# Altium PCB PCB_MPPT.PcbDoc
Units mil, origin at the board's own origin, x right, y up, seen from the top; angles counter-clockwise.
Board outline 5822.84 x 4988.19 mil, 2 copper layers (Top Layer, Bottom Layer); 115 components, 51 nets, 314 pads, 100 vias.
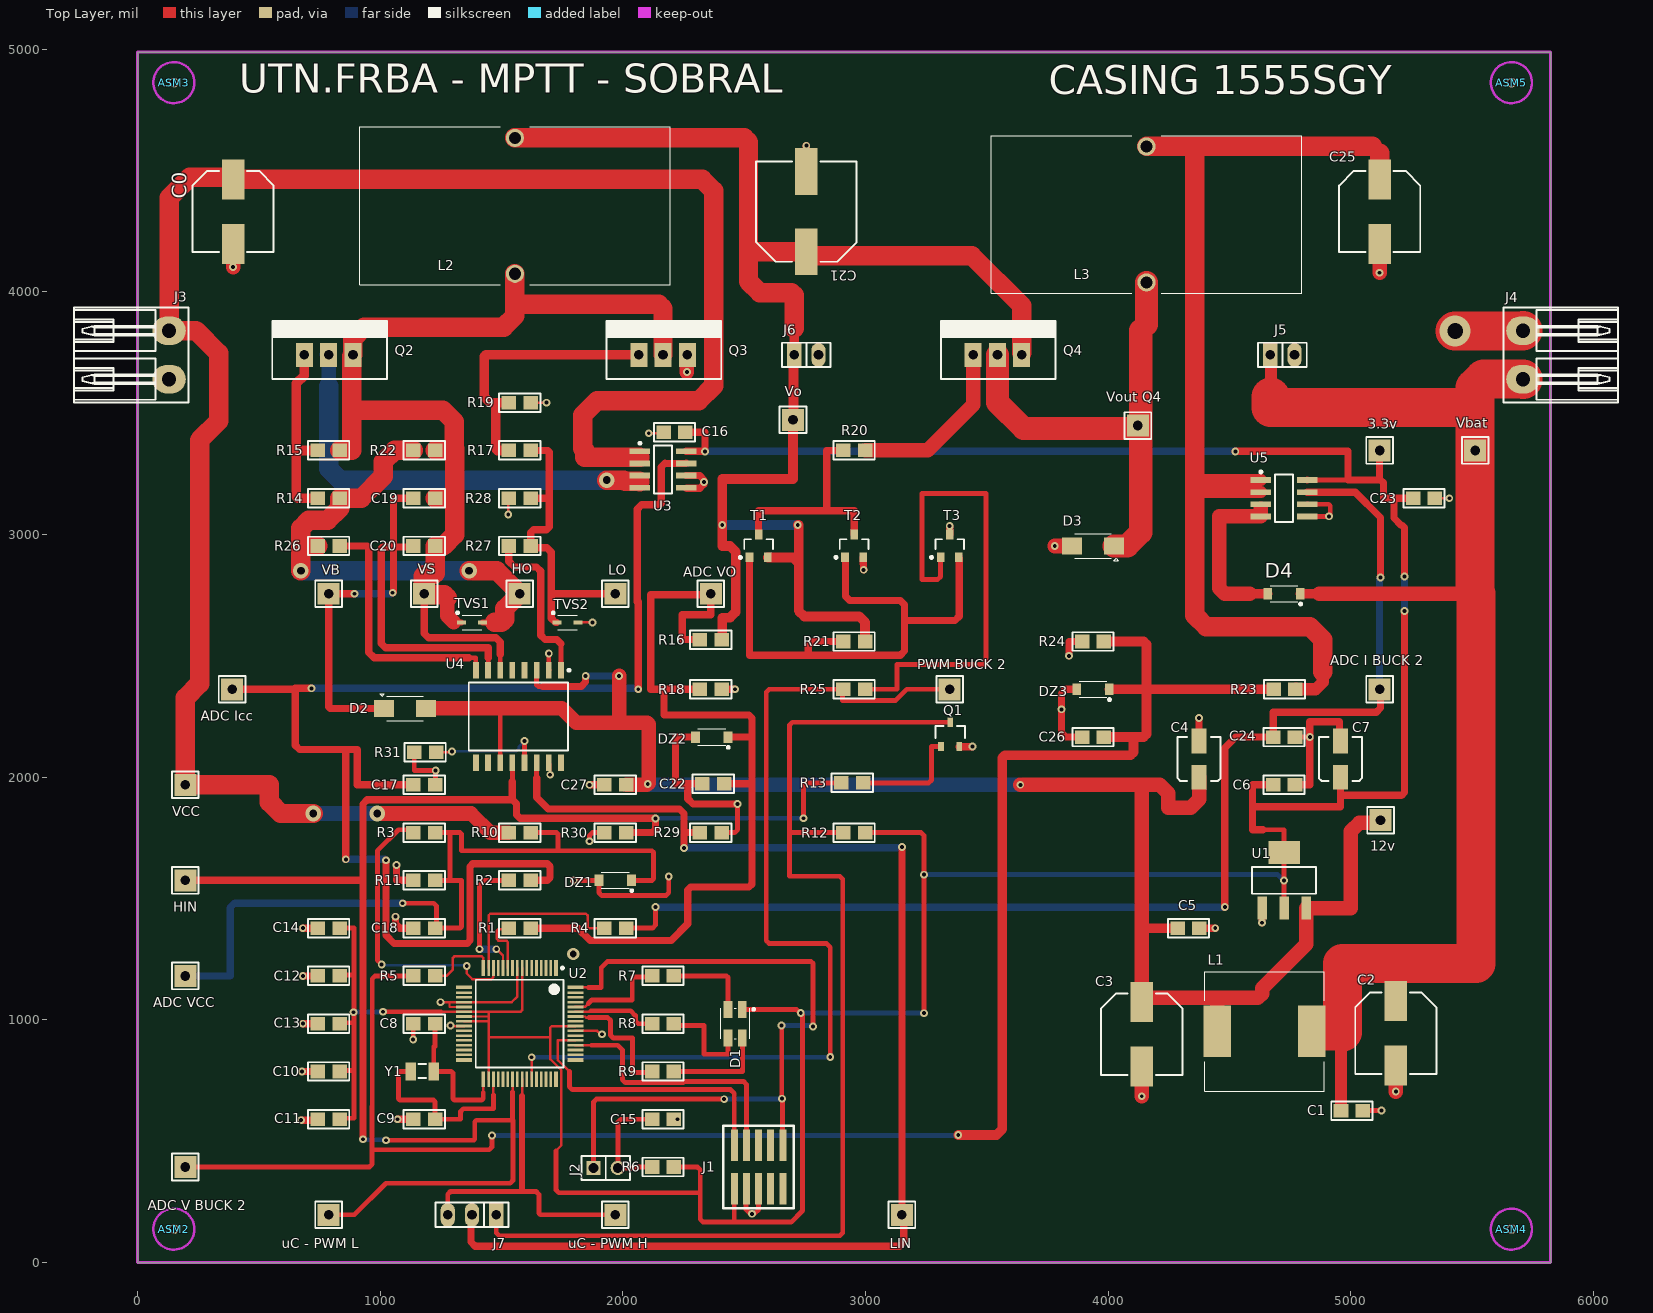
[diagram p0: Top Layer view]
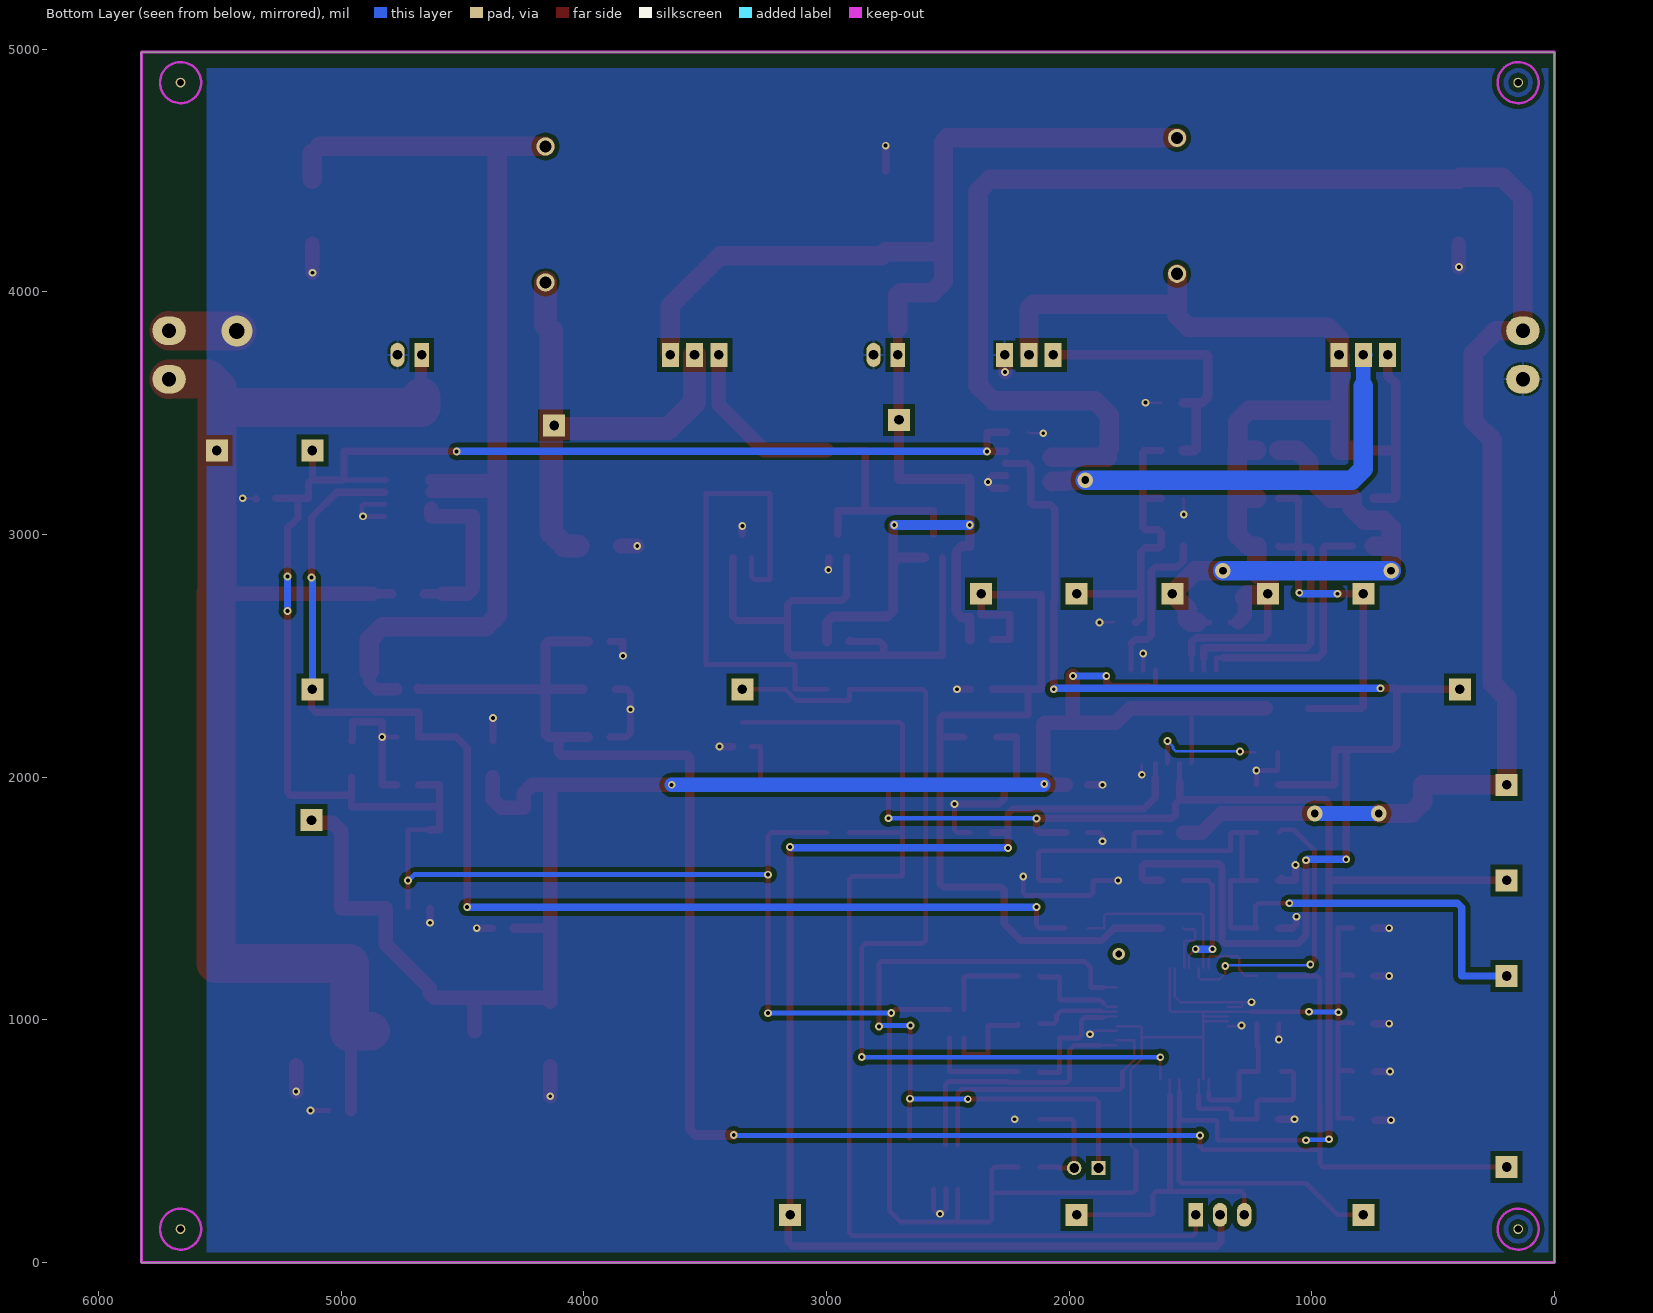
[diagram p1: Bottom Layer view, seen from below]
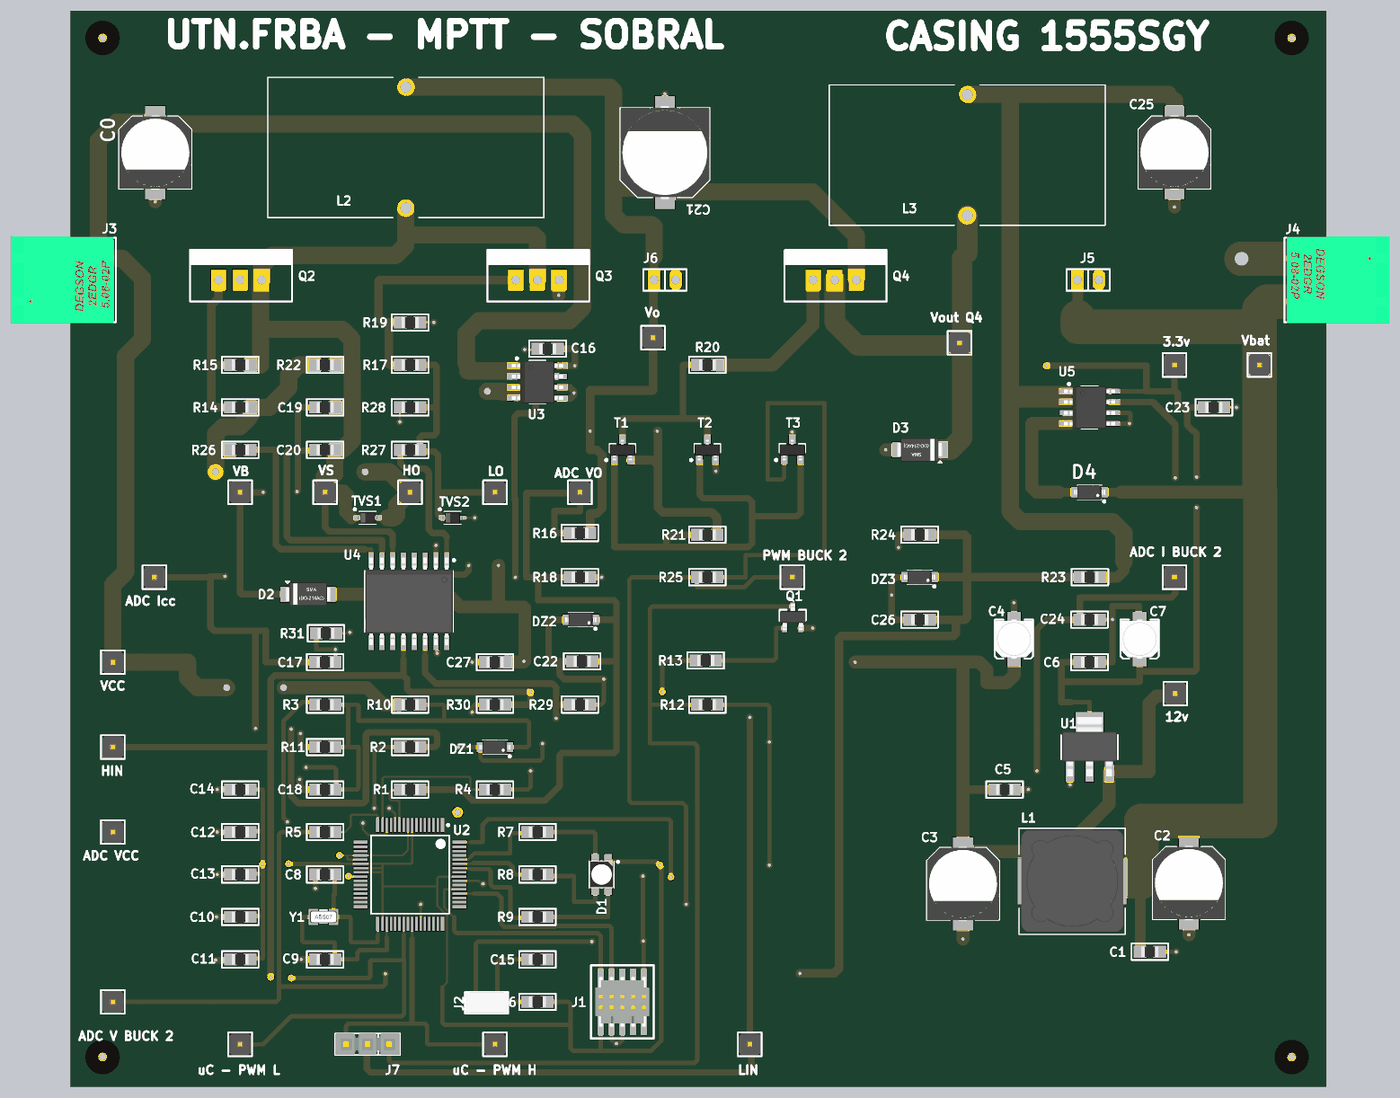
[diagram p2: 3D render of the assembled board from above, using the file's embedded part models]

## Layer stack, top to bottom
Top Solder: solder mask 0.4, Solder Resist, Dk 3.5
Top Layer: signal copper 1.4
Dielectric 1: dielectric 12.6, FR-4, Dk 4.8
Bottom Layer: signal copper 1.4
Bottom Solder: solder mask 0.4, Solder Resist, Dk 3.5

## Board outline
0,0 0,4988.19 5822.83,4988.19 5822.83,0

## Design rules (kind name [scope] priority, off if disabled: settings)
Clearance [All] p1: gap=8 ignorepadtopadclearanceinfootprint=FALSE except(19.68: Arc-Poly Track-Poly THPad-Poly Via-Poly Fill-Poly Poly-Poly)
MinimumSolderMaskSliver [All] p1 off: minsoldermaskwidth=10
PolygonConnect [All] p1: thpad.connectstyle=Relief thpad.reliefconductorwidth=10 thpad.reliefentries=4 thpad.polygonreliefangle="90 Angle" thpad.airgapwidth=10 smdpad.connectstyle=Relief smdpad.reliefconductorwidth=10 smdpad.reliefentries=4 smdpad.polygonreliefangle="45 Angle" smdpad.airgapwidth=10 via.connectstyle=Direct via.reliefconductorwidth=10 via.reliefentries=4 via.polygonreliefangle="90 Angle" via.airgapwidth=10
RoutingVias [All] p1: holewidth=16 width=32 viastyle="Through Hole" minholewidth=16 minwidth=32 maxholewidth=32 maxwidth=64
SilkToSilkClearance [All] p1 off: silktosilkclearance=10
SilkToSolderMaskClearance [IsPad] p1 off: minsilkscreentomaskgap=10 clearancetoexposedcopper=TRUE
SolderMaskExpansion [All] p1: expansion=4 istentingtop=FALSE
Width [All] p1: maxlimit=300 minlimit=10 preferedwidth=30 bottomlayer_minwidth=11 minimp=50.000000 maximp=50.000000 favimp=50.000000
27 further rules are at their usual default settings.

## Classes and differential pairs
component class Buck2: "ADC I BUCK 2" "ADC V BUCK 2" C23 C24 C25 C26 D3 D4 DZ3 L3 "PWM BUCK 2" Q4 R20 R21 R23 R24 R25 T1 T2 T3 U5 "Vout Q4"
component class Microcontrolador: ASM2 ASM3 ASM4 C8 C9 C10 C11 C12 C13 C14 C15 D1 J1 J2 R1 R2 R3 R4 R5 R6 R7 R8 R9 U2 Y1
component class Fuente: 3.3v 12v C1 C2 C3 C4 C5 C6 C7 L1 q U1 Vbat
component class Control: "ADC Icc" "ADC VCC" C0 C16 C17 C18 C19 C20 C27 D2 DZ1 HIN HO J3 J4 J5 J6 J7 LIN LO Q1 R10 R11 R12 R13 R22 R26 R27 R28 R29 R30 R31 TVS1 TVS2 U3 U4 "uC - PWM H" "uC - PWM L" VB VCC
component class Buck: "ADC VO" C21 C22 DZ2 L2 Q2 Q3 R14 R15 R16 R17 R18 R19 Vo VS

## Components (designator, comment, footprint, x,y, rotation, side; value= is the part's Value field where it differs from the comment)
3.3v "3.3v" TPTH 5118.11,3346.46 r0 top
12v "12v" TPTH 5122.05,1822.83 r0 top
"ADC I BUCK 2" "" TPTH 5118.11,2362.2 r90 top
"ADC Icc" "ADC Icc" TPTH 389.76,2362.2 r0 top
"ADC V BUCK 2" "" TPTH 196.85,393.7 r90 top
"ADC VCC" "ADC VCC" TPTH 196.85,1181.1 r0 top
"ADC VO" "ADC Vo" TPTH 2362.2,2755.91 r90 top
ASM2 "Fiducial" Fiducial 149.61,137.8 r90 top
ASM3 "Fiducial" Fiducial 149.61,4862.2 r90 top
ASM4 "Fiducial" Fiducial 5661.42,137.8 r90 top
ASM5 "Fiducial" Fiducial 5661.42,4862.2 r90 top (schematic designator ASM4)
C0 "1mF" CAPSMD8x8.3 393.7,4330.71 r270 top
C1 "0.1uF 25V 0805" 0805 5003.94,625.98 r0 top
C2 "100UF 35V" CAPSMD8x8.3 5185.04,944.88 r270 top
C3 "100UF 35V" CAPSMD8x8.3 4137.8,940.94 r270 top
C4 "10UF 20% 35V" CAPSMD4.3x4.3 4374.02,2074.8 r90 top
C5 "0.1uF 25V 0805" 0805 4330.71,1377.95 r0 top
C6 "0.1uF 25V 0805" 0805 4724.41,1968.5 r0 top
C7 "10UF 20% 35V" CAPSMD4.3x4.3 4956.69,2074.8 r90 top
C8 "18pF" 0805 1181.1,984.25 r180 top
C9 "18pF" 0805 1181.1,590.55 r180 top
C10 "0.1uF" 0805 787.4,787.4 r0 top
C11 "0.1uF" 0805 787.4,590.55 r0 top
C12 "0.1uF" 0805 787.4,1181.1 r180 top
C13 "0.1uF" 0805 787.4,984.25 r180 top
C14 "0.1uF" 0805 787.4,1377.95 r180 top
C15 "0.1uF" 0805 2165.35,590.55 r0 top
C16 "47nF" 0805 2212.6,3421.26 r180 top
C17 "4.7nF" 0805 1181.1,1968.5 r0 top
C18 "6.8pF" 0805 1181.1,1377.95 r180 top
C19 "0.1uF" 0805 1181.1,3149.61 r180 top
C20 "0.1uF" 0805 1181.1,2952.76 r180 top
C21 "7.5uF" CAPSMD10x10.3 2755.91,4330.71 r90 top
C22 "6.8pF" 0805 2372.32,1972.44 r180 top
C23 "47nF" 0805 5300.91,3149.61 r0 top
C24 "4.7nF" 0805 4724.41,2165.35 r0 top
C25 "4.7µF 35 V" CAPSMD8x8.3 5118.11,4330.71 r270 top
C26 "6.8pF" 0805 3937.01,2165.35 r180 top
C27 "0.1uF" 0805 1968.5,1968.5 r180 top
D1 "Led RGB" 4-plcc 2462.6,984.25 r0 top
D2 "M7" DO-214AC 1102.36,2283.46 r0 top
D3 "M7" DO-214AC 3937.01,2952.76 r180 top
D4 "DIODO" SOD123 4724.41,2755.91 r180 top
DZ1 "TVS 3.3V" sod123 1968.5,1574.8 r180 top
DZ2 "TVS 3.3V" sod123 2366.14,2165.35 r180 top
DZ3 "TVS 3.3V" sod123 3937.01,2362.2 r180 top
HIN "HIN" TPTH 196.85,1574.8 r90 top
HO "HO" TPTH 1574.8,2755.91 r0 top
J1 "JTAG/SWD Programmer" FTSH-105-01-XXX-DV-K 2559.06,393.7 r0 top
J2 "JUMPER" JUMPER2 1929.13,389.76 r0 top
J3 "BORNERA 2" Bornera2_DegsonH 129.92,3740.16 r270 top
J4 "BORNERA 2" Bornera2_DegsonH 5708.66,3740.16 r90 top
J5 "CON2" SIP2 4717.72,3740.16 r0 top
J6 "CON2" SIP2 2755.91,3740.16 r0 top
J7 "CON3" SIP3 1377.95,196.85 r180 top
L1 "100uHy" SRR1210 4643.7,952.76 r180 top
L2 "INDUCTOR" IND_HCTI-220-5.8 1555.12,4354.33 r90 top
L3 "INDUCTOR" IND_HCTI-220-5.8 4157.48,4318.9 r90 top
LIN "LIN" TPTH 3149.61,196.85 r0 top
LO "LO" TPTH 1968.5,2755.91 r90 top
"PWM BUCK 2" "" TPTH 3346.46,2362.2 r90 top
Q1 "2N7002-7-F" SOT23 3311.02,2125.98 r0 top
Q2 "IRF530" "TO-220 V" 787.4,3740.16 r0 top
Q3 "IRF530" "TO-220 V" 2165.35,3740.16 r0 top
Q4 "MOSFET P" "TO-220 V" 3543.31,3740.16 r0 top
R1 "10K 5% 0805" 0805 1574.8,1377.95 r0 top
R2 "10K 5% 0805" 0805 1574.8,1574.8 r0 top
R3 "10K 5% 0805" 0805 1181.1,1771.65 r0 top
R4 "10K 5% 0805" 0805 1968.5,1377.95 r0 top
R5 "10K 5% 0805" 0805 1181.1,1181.1 r180 top
R6 "10K 5% 0805" 0805 2165.35,393.7 r0 top
R7 "1K 5% 0805" 0805 2165.35,1181.1 r0 top
R8 "1K 5% 0805" 0805 2165.35,984.25 r0 top
R9 "1K 5% 0805" 0805 2165.35,787.4 r0 top
R10 "68k 5% 0805" 0805 1574.8,1771.65 r180 top
R11 "10k 5% 0805" 0805 1181.1,1574.8 r0 top
R12 "1k 5% 0805" 0805 2952.76,1771.65 r0 top
R13 "10 5% 0805" 0805 2944.88,1976.38 r180 top
R14 "10 5% 0805" 0805 787.4,3149.61 r0 top
R15 "1k 5% 0805" 0805 787.4,3346.46 r180 top
R16 "47k 5% 0805" 0805 2362.2,2566.93 r0 top
R17 "10 5% 0805" 0805 1574.8,3346.46 r0 top
R18 "10k 5% 0805" 0805 2362.2,2362.2 r180 top
R19 "1k 5% 0805" 0805 1574.8,3543.31 r180 top
R20 "10 5% 0805" 0805 2952.76,3346.46 r180 top
R21 "4.7k 5% 0805" 0805 2952.76,2559.06 r180 top
R22 "1k 5% 0805" 0805 1181.1,3346.46 r0 top
R23 "39k 5% 0805" 0805 4726.1,2362.2 r0 top
R24 "10k 5% 0805" 0805 3937.01,2559.06 r0 top
R25 "1K 5% 0805" 0805 2952.76,2362.2 r0 top
R26 "10 5% 0805" 0805 787.4,2952.76 r180 top
R27 "10 5% 0805" 0805 1574.8,2952.76 r0 top
R28 "1k 5% 0805" 0805 1574.8,3149.61 r0 top
R29 "1k 5% 0805" 0805 2362.2,1771.65 r180 top
R30 "1k 5% 0805" 0805 1968.5,1771.65 r0 top
R31 "1k 5% 0805" 0805 1185.04,2102.36 r0 top
T1 "BC547" SOT23-3 2559.06,2952.76 r90 top
T2 "BC557" SOT23-3 2952.76,2952.76 r90 top
T3 "BC547" SOT23-3 3346.46,2952.76 r90 top
TVS1 "Transient Voltage Supressor" SOD323 1377.95,2637.8 r0 top
TVS2 "Transient Voltage Supressor" SOD323 1771.65,2637.8 r0 top
U1 "1117-3.3V" SOT223 4724.41,1574.8 r0 top
U2 "LPC5441" LQFP64 1574.8,984.25 r270 top
U3 "TMCS1108A4BQDR" SOIC8 2165.35,3267.72 r0 top
U4 "IR2110 16" SOIC16W 1569.49,2250 r270 top
U5 "TMCS1108A4BQDR" SOIC8 4724.41,3149.61 r0 top
"uC - PWM H" "PWM L" TPTH 1968.5,196.85 r0 top
"uC - PWM L" "PWM H" TPTH 787.4,196.85 r90 top
VB "VB" TPTH 787.4,2755.91 r0 top
Vbat "Vbat" TPTH 5511.81,3346.46 r0 top
VCC "VCC" TPTH 196.85,1968.5 r0 top
Vo "Vo" TPTH 2700.79,3472.44 r90 top
"Vout Q4" "Vout Q4" TPTH 4122.05,3448.82 r90 top
VS "VS" TPTH 1181.1,2755.91 r90 top
Y1 "32.768 kHz" ABS07_Xtal 1125.98,787.4 r0 top

## Footprints (in the part's own frame and the unit in brackets; to place one, negate y for a bottom-side part, rotate by r counter-clockwise, add the part's x,y. Pads: shape width x height; smd on the part's side, far side on the other; paste and mask are expansions set on the pad)
4-plcc [mm]
  rect 0.9x1.8 smd: A(0.75,1.5) B(0.75,-1.5) G(-0.75,-1.5) R(-0.75,1.5)
  silkscreen extent -1.5,-1.6 2.04,1.61, body extent -1.4,-1.75 1.4,1.75, height 1.9
0805 [mil] "Pasivo 0805"
  rect 60x56 smd: 1(-45,0) 2(45,0)
  silkscreen extent -85,-38 85,38, body extent -39,-24 39,25, height 15
ABS07_Xtal [mm]
  rect 1.1x1.9 smd: 1(0,0) 2(2.4,0)
  silkscreen extent 0.8,-0.7 1.6,0.8, body extent -0.41,-0.76 2.81,0.76, height 0.91
Bornera2_DegsonH [mm]
  oval 3x3.5 hole 1.5: 1(-2.54,0) 2(2.54,0)
  silkscreen extent -4.98,-9.95 4.98,2.05, body extent -5.08,-10.3 5.08,1.8, height 8.2
CAPSMD4.3x4.3 [mm] "Aluminum Electrolytic Capacitor, Body 8,30x8,30x10,00mm, IPC Low Density"
  rect 2.6x1.6 smd: 1(-1.9,0) 2(1.9,0)
  silkscreen extent -2.3,-2.25 2.3,2.25, body extent -2.28,-2.15 2.32,2.15, height 5.6
CAPSMD8x8.3 [mm] "Aluminum Electrolytic Capacitor, Body 8,30x8,30x10,00mm, IPC Low Density"
  rect 4.2x2.35 smd: 1(-3.375,0) 2(3.375,0)
  silkscreen extent -4.25,-4.25 4.25,4.25, body extent -4.35,-4.25 4.35,4.25, height 10
CAPSMD10x10.3 [mm] "Aluminum Electrolytic Capacitor, Body 10,30x10,30x10,00mm, IPC Low Density"
  rect 4.9x2.35 smd: 1(-4.2,0) 2(4.2,0)
  silkscreen extent -5.25,-5.25 5.25,5.25, body extent -5.45,-5.25 5.45,5.25, height 10
DO-214AC [mm]
  rect 2.1x1.8 smd: 1(2.2,0) 2(-2.2,0)
  silkscreen extent -2.67,-1.27 1.91,1.52, body extent -2.75,-1.4 2.75,1.4, height 2.6
Fiducial [mil] "Fiducial Mark for PickN'Place"
  round 40 hole 30 mask+60: 0(0,0)
FTSH-105-01-XXX-DV-K [mil]
  rect 29x130 smd mask+2: 1(-100,-90) 2(-100,90) 3(-50,-90) 4(-50,90) 5(0,-90) 6(0,90) 7(50,-90) 8(50,90) 9(100,-90) 10(100,90)
  silkscreen extent -145,-170 145,170, body extent -125,-115 125,115, height 237
IND_HCTI-220-5.8 [mil]
  round 75 hole 50: 1(-280,0) 2(280,0)
  silkscreen extent -325,-640 325,640
JUMPER2 [mm]
  rect 1.5x1.5 hole 1.016: 1(-1.27,0)
  round 1.5 hole 1.016: 2(1.27,0)
  silkscreen extent -2.54,-1.27 2.54,1.27, body extent -2.46,-1.27 2.54,1.27, height 9.5
LQFP64 [mm]
  rect 1.65x0.4 smd: 1(-5.825,3.81) 16(-5.825,-3.81) 33(5.825,-3.81) 48(5.825,3.81)
  rect 1.65x0.28 smd: 2(-5.825,3.25) 3(-5.825,2.75) 4(-5.825,2.25) 5(-5.825,1.75) 6(-5.825,1.25) 7(-5.825,0.75) 8(-5.825,0.25) 9(-5.825,-0.25) 10(-5.825,-0.75) 11(-5.825,-1.25) 12(-5.825,-1.75) 13(-5.825,-2.25) 14(-5.825,-2.75) 15(-5.825,-3.25) 34(5.825,-3.25) 35(5.825,-2.75) 36(5.825,-2.25) 37(5.825,-1.75) 38(5.825,-1.25) 39(5.825,-0.75) 40(5.825,-0.25) 41(5.825,0.25) 42(5.825,0.75) 43(5.825,1.25) 44(5.825,1.75) 45(5.825,2.25) 46(5.825,2.75) 47(5.825,3.25)
  rect 0.4x1.65 smd: 17(-3.81,-5.825) 32(3.81,-5.825) 49(3.81,5.825) 64(-3.81,5.825)
  rect 0.28x1.65 smd: 18(-3.25,-5.825) 19(-2.75,-5.825) 20(-2.25,-5.825) 21(-1.75,-5.825) 22(-1.25,-5.825) 23(-0.75,-5.825) 24(-0.25,-5.825) 25(0.25,-5.825) 26(0.75,-5.825) 27(1.25,-5.825) 28(1.75,-5.825) 29(2.25,-5.825) 30(2.75,-5.825) 31(3.25,-5.825) 50(3.25,5.825) 51(2.75,5.825) 52(2.25,5.825) 53(1.75,5.825) 54(1.25,5.825) 55(0.75,5.825) 56(0.25,5.825) 57(-0.25,5.825) 58(-0.75,5.825) 59(-1.25,5.825) 60(-1.75,5.825) 61(-2.25,5.825) 62(-2.75,5.825) 63(-3.25,5.825)
  silkscreen extent -5.95,-4.6 4.6,4.6, body extent -5,-5 5,5, height 1.6
SIP2 [mm]
  rect 1.5x2.5 hole 1.016: 1(-1.27,0)
  oval 1.5x2.5 hole 1.016: 2(1.27,0)
  silkscreen extent -2.54,-1.27 2.54,1.27
SIP3 [mm]
  rect 1.5x2.5 hole 1.016: 1(-2.54,0)
  oval 1.5x2.5 hole 1.016: 2(0,0) 3(2.54,0)
  silkscreen extent -3.81,-1.27 3.81,1.27, body extent -3.81,-1.3 3.81,1.24, height 8.38
SOD123 [mm]
  rect 0.9x1.2 smd: 1(1.7,0) 2(-1.7,0)
  silkscreen extent -1.85,-0.85 1.45,1.2, body extent -1.85,-0.85 1.85,0.85, height 1.35
sod123 [mm]
  rect 0.9x1.2 smd: 1(1.7,0) 2(-1.7,0)
  silkscreen extent -1.85,-0.85 1.45,1.2, body extent -1.85,-0.85 1.85,0.85, height 1.35
SOD323 [mm]
  rect 0.95x0.45 smd: 1(-1.1,0) 2(1.1,0)
  silkscreen extent -1.62,-0.75 1,1.12, body extent -1.3,-0.67 1.3,0.68, height 1.1
SOIC8 [mm]
  rect 2.15x0.6 smd: 1(-2.425,1.905) 2(-2.425,0.635) 3(-2.425,-0.635) 4(-2.425,-1.905) 5(2.425,-1.905) 6(2.425,-0.635) 7(2.425,0.635) 8(2.425,1.905)
  silkscreen extent -2.55,-2.5 0.95,2.88, body extent -3.01,-2.51 3.01,2.49, height 1.75
SOIC16W [mm] "SOIC 16 WIDE"
  rect 1.75x0.6 smd: 1(-4.85,4.445) 2(-4.85,3.175) 3(-4.85,1.905) 4(-4.85,0.635) 5(-4.85,-0.635) 6(-4.85,-1.905) 7(-4.85,-3.175) 8(-4.85,-4.445) 9(4.85,-4.445) 10(4.85,-3.175) 11(4.85,-1.905) 12(4.85,-0.635) 13(4.85,0.635) 14(4.85,1.905) 15(4.85,3.175) 16(4.85,4.445)
  silkscreen extent -4.97,-5.2 3.57,5.42, body extent -5.15,-5.15 5.15,5.15, height 2.65
SOT23 [mm]
  rect 0.6x0.95 smd: 1(0,0) 2(0.95,2.55) 3(1.9,0)
  silkscreen extent -0.6,0.87 2.5,2.17, body extent -0.53,-0.25 2.47,2.88, height 1
SOT23-3 [mm] "SOT23, 3-Leads, Body 2,90x2,45mm, Pitch 0,95mm, IPC Medium Density"
  rect 1x0.8 smd: 1(-1.2,0.95) 2(-1.2,-0.95) 3(1.2,0)
  silkscreen extent -1.32,-1.5 0.7,2.02, body extent -1.25,-1.5 1.2,1.5, height 1
SOT223 [mm] "SOT223"
  rect 1x2.4 smd: 1(-2.3,-2.9) 2(0,-2.9) 3(2.3,-2.9)
  rect 3.3x2.4 smd: 4(0,2.9)
  silkscreen extent -3.35,-1.4 3.35,1.4, body extent -3.25,-3.45 3.25,3.55, height 1.62
SRR1210 [mm]
  rect 2.9x5.4 smd: 1(-4.95,0) 2(4.95,0)
  silkscreen extent -6.25,-6.25 6.25,6.25, body extent -6.03,-6.03 5.97,5.97, height 8.05
"TO-220 V" [mil]
  rect 70x98.43 hole 40: 1(-100,0) 2(0,0) 3(100,0)
  silkscreen extent -232,-100 240,139, body extent -197,-79 197,118, height 709
TPTH [mm]
  rect 2.3x2.3 hole 1.016: 1(0,0)
  silkscreen extent -1.4,-1.4 1.4,1.4, body extent -1.27,-1.27 1.27,1.27, height 6.04

## Part data
3.3v 12v "ADC I BUCK 2" "ADC Icc" "ADC V BUCK 2" "ADC VCC" "ADC VO" HIN HO LIN LO "PWM BUCK 2" "uC - PWM H" "uC - PWM L" VB Vbat VCC Vo "Vout Q4" VS: library part TP
ASM2 ASM3 ASM4 ASM5: "Fiducial Mark for PCB Asembly on Pick N' Place"
C0 C2 C3: library part CAPPOL, "Capacitores electrolíticos de aluminio 100 µF 35 V Radial, encapsulado - terminales SMD 1000 h a 105°C"
C1 C5 C6 C16 C17 C18 C22 C23 C24 C26: library part CAP
C4 C7: library part CAPPOL, "Capacitores electrolíticos de aluminio 10 µF 35 V Radial, encapsulado - terminales SMD 2000 h a 105°C"
C8 C9: library part "CAPACITOR NON-POL", "CAP CER 0.1UF X7R 0805"
C10 C11 C12 C13 C14: library part "CAP NP", "CAP CER 0.1UF X7R 0805"
C15 C19 C20 C27: library part CAP, "CAP CER 0.1UF X7R 0805"
C21: library part CAPPOL, "CAP ALUM 7.5UF 20% 450V SMD"
C25: library part CAPPOL
D1: library part LED_RGB, "CREE LED P/N: CLV1L-FKB-CHMMQEHBB7673673CT-ND / CREE LED P/N: CLMVC-FKA-CL1D1L71BB7C3C3CT-ND"
D2 D3: library part DIODO, "Diodos Estándar 1000 V 1A Montaje en superficie SMA"
DZ1 DZ2 DZ3: library part "DIODO ZENER"
J1: library part JTAG, "CONN HEADER 10POS DUAL .05\" SMD -> FTSH-105-01-F-DV-K"
L1: library part INDUCTOR, "SRR1210-101M - 100 µH Blindado Drum Core, Wirewound Inductivo 2.5 A 135mOhm máx. No estándar"
L3: "https://www.delevan.com/-/media/Project/Altramotion/shared/files/Literature/brand/Delevan/pdf/powerinductor/radialleaded/powertoroids/page103_106_ptseries.pdf"
Q1: library part "MOSFET N", "Canal N Montaje en superficie 60 V 115mA (Ta) 370mW (Ta) SOT-23-3"
Q2 Q3: library part "MOSFET N"
R1 R2 R3 R4 R5 R7 R8 R9 R10 R11 R12 R13 R14 R15 R16 R17 R18 R19 R20 R21 R22 R23 R24 R25 R26 R27 R28 R29 R30 R31: library part RES
R6: library part RES, "RES SMD 10K OHM 5% 1/8W 0805"
T1 T3: library part "TRANSISTOR NPN", "Transistores - Bipolar (BJT) - Simple NPN 45 V 100 mA 300MHz 500 mW Orificio pasante TO-92-3"
T2: library part "TRANSISTOR PNP", "Transistores - Bipolar (BJT) - Simple PNP 45 V 100 mA 150MHz 500 mW Orificio pasante TO-92-3"
TVS1 TVS2: library part TVS
U1: library part LT1117CST-3.3, "IC REG LINEAR 3.3V 800MA SOT223", Dropout Voltage(V)=1.1, Manufacturer="Linear Technology", Output Voltage="3.3 V", Supplier Part Number 1=LT1117CST-3.3-ND, ComponentLink1Description="Manufacturer URL", ComponentLink1URL=http://www.linear.com/, ComponentLink2Description=Datasheet, ComponentLink2URL=http://cds.linear.com/docs/en/datasheet/1117fd.pdf, ComponentLink3Description="Package Specification", ComponentLink3URL=http://cds.linear.com/docs/en/packaging/SOT_3_05-08-1630.pdf, DatasheetVersion="Rev. D", Discrete Pass Element=no, Iout(mA)=800, Isupply(mA)=5, Mounting Technology="Surface Mount", Number of Outputs=1, PackageDescription="3-Pin Plastic SOT-223, 3.505 x 6.505 mm Body, Pitch 2.3 mm", PackageReference=ST-3, PackageVersion=Jun-10, PartNumber=LT1117CST-3.3, PSRR(dB)=75, RoHS=FALSE, Supplier 1=Digi-Key, Supplier 2=Newark, Supplier Part Number 2=57M1797, Vin Max(V)=15, Vin Min(V)=2.45
U3 U5: library part MLX91221KDC, "Sensores de corriente 1 canal Efecto Hall Bidireccional 8-SOIC (ancho 0.154\", 3.90mm)"
U4: "Medio puente controladores de compuerta IC No inversor 14-DIP"
Y1: library part "XTAL ABS07", "XTAL ABS07 by ABRACON LLC"

## Via types
v1: diameter 32, hole 16, Top Layer to Bottom Layer, tented both sides, 82 vias
v2: diameter 32, hole 16, Top Layer to Bottom Layer, 11 vias
v3: diameter 64, hole 32, Top Layer to Bottom Layer, tented both sides, 4 vias
v4: diameter 50, hole 28, Top Layer to Bottom Layer, 1 vias
v5: diameter 128, hole 64, Top Layer to Bottom Layer, tented both sides, 1 vias
v6: diameter 64, hole 32, Top Layer to Bottom Layer, 1 vias

## Nets (pads, with @x,y where several pads share a name; then routed paths per layer and width w, separated by ;. In a path a pad name is that pad's centre, name@x,y a point inside that pad or via, vN(x,y) a via of type N, cw(c..) or ccw(c..) an arc to the next point about the centre after c; other vN are vias at no path point)
+3.3V: 3.3v.1 C6.1 C7.1 C10.2 C11.2 C12.1 C13.1 C14.1 C16.1 C23.1 D1.A J1.1 R6.2 R12.2 U1.2 U1.4 U2.8 U2.22 U2.23 U2.24 U2.34 U2.56 U3.8 U5.8 | length 15373.3
  Top Layer w10: 1250,1033.46 U2.22 1446.85,1033.46 ; U2.24 1442.38,994.09 ; U2.23 1446.85,1013.78 ; U2.34 1446.85,929.13 ; U2.8 1584.65,1039.91 1578.2,1033.46 1446.85,1033.46 ; 1724.41,460.63 1746.18,482.4 1746.18,792.99 1700.69,838.48 1700.69,929.13 ; U2.56 1707.13,974.41 1700.69,967.97 1700.69,929.13 ; 1446.85,929.13 1446.85,1013.78 ; 1446.85,929.13 1700.69,929.13 ; 1446.85,1013.78 1446.85,1033.46
  Top Layer w20: C11.2 836.38,594.53 891.74,594.53 891.74,791.38 ; C10.2 836.38,791.38 891.74,791.38 ; C13.1 836.38,988.23 891.74,988.23 ; C12.1 836.38,1185.08 891.74,1185.08 ; C14.1 891.74,1377.95 891.74,1185.08 ; v2@891.74,1029.89 891.74,988.23 ; v2@891.74,1033.46 891.74,1185.08 ; v2(1011.81,1033.46) 1250,1033.46 ; 1724.41,460.63 1724.41,299.12 1736.13,287.4 2318.9,287.4 ; R6.2 2307.18,393.7 2318.9,381.98 2318.9,287.4 ; 2459.06,175.73 J1.1 ; D1.A 2714.91,1043.31 2730.32,1027.9 v2(2732.63,1027.9) 2740.16,1020.37 2740.16,213.94 2693.01,166.79 2455.12,166.79 2330.61,166.79 2318.9,178.5 2318.9,287.4 ; R12.2 3228.44,1771.65 3240.16,1759.94 v1(3240.16,1598.43) v1(3240.16,1027.56) ; 4637.8,1783.46 4724.41,1783.46 U1.4 v1(4724.41,1574.8) U1.2 ; U5.8@4819.88,3224.41 4988.19,3224.41 ; 891.74,791.38 891.74,988.23
  Top Layer w30: C16.1 2338.58,3421.26 v1@2338.58,3342.72 ; U3.8 v1@2338.58,3342.72 ; v1(2338.58,3342.52) v1@2338.58,3342.72 ; v2(4523.62,3342.52) 4988.19,3342.52 4988.19,3224.41 5118.11,3224.41 ; 4637.8,1783.46 4594.49,1783.46 4594.49,1877.95 ; C6.1 4594.49,1968.5 4594.49,1877.95 ; U5.8@4819.88,3224.41 U5.8 ; C7.1 4956.69,1925.2 ; 3.3v.1 5118.11,3224.41 ; v1(5220.47,2685.04) 5220.47,1936.91 5208.76,1925.2 4956.69,1925.2 ; v1(5220.47,2826.77) 5220.47,3027.65 5208.76,3039.37 5205.43,3039.37 5177.17,3067.63 5177.17,3149.61 ; C23.1@5269.96,3149.61 5177.17,3149.61 ; 4594.49,1877.95 4956.69,1877.95 4956.69,1925.2 ; 5118.11,3224.41 5122.14,3224.41 5133.86,3212.69 5133.86,3149.61 5177.17,3149.61
  Bottom Layer w11: v2(890.13,1031.5) v2@891.12,1032.48 ; v2@1010.83,1032.48 v2(1011.81,1033.46)
  Bottom Layer w20: v2@891.12,1032.48 v2@1010.83,1032.48 ; v2@2736.22,1027.56 v1(3240.16,1027.56) ; v1(3240.16,1598.43) 4697.54,1598.43 4721.16,1574.8 v1(4724.41,1574.8)
  Bottom Layer w30: v1(2338.58,3342.52) v2(4523.62,3342.52) ; v1(5220.47,2685.04) v1(5220.47,2826.77)
+12V: 12v.1 C3.1 C4.1 C5.1 C27.1 D2.1 L1.2 U1.3 U4.3 U4.11 | length 7334.1
  Top Layer w20: 1484.25,2283.46 1494.49,2283.46 ; U4.11 1494.49,2283.46 ; 1499.8,2283.46 1494.49,2283.46 ; U4.3 1644.49,2380.46 1650.93,2374.02 1669.29,2374.02
  Top Layer w30: 1669.29,2374.02 1827.98,2374.02 1846.07,2392.11 1846.07,2416.57 v1(1846.46,2416.95)
  Top Layer w40: 4137.8,1377.95 C5.1
  Top Layer w60: D2.1 1484.25,2283.46 ; 1499.8,2283.46 1748.03,2283.46 1807.09,2224.41 1984.25,2224.41 ; v1(1984.25,2416.95) 1984.25,2224.41 ; C27.1 v1@2098.43,1968.5 ; v1@2106.3,1974.95 2106.3,2217.97 2099.86,2224.41 1984.25,2224.41 ; v1(3637.8,1968.5) 4137.8,1968.5 ; C4.1 4375.18,1998.83 4375.18,1908.88 4340.03,1873.73 4248.03,1873.73 4248.03,1933.36 4212.88,1968.5 4137.8,1968.5 ; L1.2 4448.82,1090.55 ; 12v.1 5111.12,1811.9 5035.15,1811.9 5000,1776.76 5000,1460.63 U1.3 4814.96,1311.02 4633.86,1129.92 4633.86,1108.12 4616.28,1090.55 4448.82,1090.55 ; 4137.8,1968.5 4137.8,1377.95 C3.1 4154.53,1090.55 4448.82,1090.55
  Bottom Layer w30: v1(1846.46,2416.95) v1(1984.25,2416.95)
  Bottom Layer w60: v1@2106.3,1968.5 v1(3637.8,1968.5)
  other v1: 2102.36,1972.44
ADC_I_Buck2: "ADC I BUCK 2.1" C24.1 R4.2 U5.7 | length 5106
  Top Layer w20: R4.2 2122.14,1377.95 2133.86,1389.67 v1(2133.86,1464.57)
  Top Layer w30: v1(4480.31,1464.57) 4480.31,2120.22 4525.45,2165.35 C24.1 4679.41,2267.72 5104.47,2267.72 5122.05,2285.29 5122.05,2358.27 5118.11,2362.2 ; U5.7 5017.86,3174.61 5122.05,3070.42 v1(5122.05,2822.83)
  Bottom Layer w30: v1(2133.86,1464.57) v1(4480.31,1464.57) ; 5118.11,2362.2 5118.11,2818.36 5122.05,2822.29 v1(5122.05,2822.83)
ADC_Icc: "ADC Icc.1" C17.1 R2.2 U3.7 | length 5734.2
  Top Layer w30: 389.76,2362.2 649.61,2362.2 ; v1@715.99,2366.14 649.61,2366.14 649.61,2131.75 667.18,2114.17 858.27,2114.17 ; v1(858.27,1661.42) 858.27,2114.17 ; v1(1023.62,1657.48) 1023.62,1348.28 1056.94,1314.96 1358.36,1314.96 1370.08,1326.68 1370.08,1631.45 1381.79,1643.16 1688.3,1643.16 1700.02,1631.45 1700.02,1586.52 1688.3,1574.8 R2.2 ; C17.1 940.94,1968.5 905.51,1968.5 905.51,2114.17 858.27,2114.17 ; v1(2062.99,2362.2) 2062.99,2723.38 2059.06,2723.38 2059.06,3104.47 2076.63,3122.05 2151.04,3122.05 2157.48,3128.49 2157.48,3278.29 2173.85,3294.66 2175.79,3292.72 2259.25,3292.72 2260.83,3294.29 U3.7
  Bottom Layer w30: v1(716.54,2366.14) 2058.51,2366.14 2062.45,2362.2 v1(2062.99,2362.2) ; v1(858.27,1661.42) 1019.14,1661.42 1023.08,1657.48 v1(1023.62,1657.48)
ADC_V_Buck2: "ADC V BUCK 2.1" C26.1 DZ3.2 R5.2 R23.1 R24.2 | length 7903.9
  Top Layer w20: 220.47,393.7 955.1,393.7 966.82,405.42 966.82,464.57 ; R5.2 978.83,1181.1 967.11,1169.39 967.11,643.4 966.82,643.1 966.82,464.57 ; v1(1460.63,523.62) 1460.63,476.28 1448.91,464.57 966.82,464.57
  Top Layer w40: v1(3381.89,525.59) 3539.56,525.59 3562.99,549.02 3562.99,2078.84 3574.71,2090.55 4092.54,2090.55 4104.25,2102.27 4104.25,2165.35 ; C26.1 4104.25,2165.35 ; R24.2 4145.76,2559.06 4157.48,2547.34 4157.48,2362.2 ; DZ3.2 4157.48,2362.2 ; R23.1@4681.1,2366.14 R23.1 4157.48,2362.2 ; 4104.25,2165.35 4145.76,2165.35 4157.48,2177.07 4157.48,2362.2
  Bottom Layer w20: v1(1460.63,523.62) 3379.92,523.62 v1(3381.89,525.59)
ADC_Vcc: "ADC VCC.1" C18.1 DZ1.2 R3.2 R10.1 R11.2 | length 3390.3
  Top Layer w20: v1(1092.52,1480.31) 1220.57,1480.31 1232.28,1468.6 1232.28,1382.44 C18.1@1227.8,1377.95 ; C18.1 1226.1,1376.26 C18.1@1227.8,1377.95 ; R11.2 1287.4,1574.8 ; R3.2 1287.4,1771.65 ; 1335.36,1696.99 1335.36,1765.21 1328.92,1771.65 1287.4,1771.65 ; 1338.58,1696.99 1728.35,1696.99 ; R10.1 1725.84,1771.65 1732.28,1765.21 1732.28,1700.93 1728.35,1696.99 ; DZ1.2 2119.54,1574.8 2125.98,1581.25 2125.98,1690.55 2119.54,1696.99 1728.35,1696.99 ; C18.1@1227.8,1377.95 1328.92,1377.95 1335.36,1384.4 1335.36,1574.8 1287.4,1574.8 ; 1287.4,1574.8 1287.4,1771.65
  Bottom Layer w30: 196.85,1181.1 381.89,1181.1 381.89,1462.74 399.46,1480.31 v1(1092.52,1480.31)
ADC_Vo: "ADC VO.1" C22.1 DZ2.2 R1.2 R16.1 R18.2 | length 3697.4
  Top Layer w30: R1.2 1814.03,1377.95 1865.03,1326.95 2199.14,1326.95 2267.72,1395.53 2267.72,1535.53 2279.43,1547.24 2519.78,1547.24 2531.5,1558.96 2531.5,1976.38 ; R18.2 2175.73,2362.2 ; R16.1 2244.09,2566.93 2244.09,2669.29 2362.2,2669.29 2362.2,2755.91 2358.27,2751.97 2114.17,2751.97 2114.17,2362.2 2175.73,2362.2 ; C22.1 2527.56,1972.44 2531.5,1976.38 ; DZ2.2 2519.78,2165.35 ; 2175.73,2362.2 2169.29,2355.76 2169.29,2255.91 2519.78,2255.91 2531.5,2244.19 2531.5,1976.38
GND: C0.2 C1.2 C2.2 C3.2 C4.2 C5.2 C6.2 C7.2 C8.2 C9.2 C10.1 C11.1 C12.2 C13.2 C14.2 C15.2 C16.2 C17.2 C18.2 C21.2 C22.2 C23.2 C24.2 C25.2 C26.2 C27.2 D3.1 DZ1.1 DZ2.1 DZ3.1 J1.3 J1.5 J3.2 J4.2 J5.2 J6.2 Q1.3 Q3.3 R11.1 R18.1 R19.1 R24.1 R28.1 R29.1 R30.1 R31.1 T2.2 T3.3 TVS2.2 U1.1 U2.9 U2.20 U2.21 U2.25 U2.55 U3.5 U3.6 U4.2 U4.15 U5.5 U5.6 | length 6708.8
  Top Layer w10: C11.1@738.46,586.61 C11.1 ; C10.1@740.16,785.16 C10.1 ; v2(1248.03,1072.83) 1281.78,1072.83 ; v2(1289.37,976.38) 1291.33,974.42 U2.25@1345.46,974.42 ; U2.21 1285.43,1053.15 1285.43,1069.18 1281.78,1072.83 ; v1(1527.56,3082.68) 1527.56,3147.36 R28.1 ; U2.9 1564.96,1096.46 1541.34,1072.83 U2.20 1281.78,1072.83 ; R19.1 v1(1685.04,3543.31) ; U4.15@1699.8,2053.15 1700.05,2052.9 1700.05,2010.29 v1(1700.3,2010.04) ; U2.55 1893.92,954.72 1907.7,940.94 v1(1913.39,940.94) ; TVS2.2 v1(1874.39,2637.8) ; v1(2106.3,3417.32) 2163.66,3417.32 C16.2 ; C15.2 v1(2224.35,590.55) ; C23.2@5349.84,3145.67 C23.2 v1(5405.51,3149.61)
  Top Layer w20: v1(1135.83,919.29) 1135.83,983.98 C8.2 ; R31.1 1140.04,2027.56 v1(1228.35,2027.56) 1228.35,1970.75 C17.2 ; U4.2@1694.88,2440.94 1694.69,2441.14 1694.69,2509.65 v1(1694.88,2509.84) ; v1(1797.78,1574.8) DZ1.1 1901.57,1523.53 1913.29,1511.81 2177.26,1511.81 2188.98,1523.53 v1(2188.98,1590.55) ; v1(1862.2,1736.22) 1862.9,1736.91 1862.9,1759.94 1874.61,1771.65 R30.1 ; R29.1 2460.73,1771.65 2472.44,1783.37 v1(2472.44,1889.76) ; J1.3 2507.87,302.52 2507.87,218.5 2523.29,203.08 2529.2,203.08 v1(2531.5,200.79) 2533.79,203.08 2544.09,203.08 2559.06,218.05 J1.5 ; C24.2 v1(4830.71,2165.35) ; U5.5 v1@4909.25,3074.61 ; U5.6 4821.26,3125.98 4822.64,3124.61 4908.07,3124.61 4914.51,3118.16 v1@4914.51,3077.31 ; C1.2 v1(5125.98,625.98)
  Top Layer w30: v1(673.23,586.61) C11.1@738.46,586.61 ; v1(677.17,787.4) 737.91,787.4 C10.1@740.16,785.16 ; v1(681.1,984.25) C13.2 ; v1(681.1,1181.1) C12.2 ; v1(681.1,1377.95) C14.2 ; v1(1062.99,1425.2) 1063.37,1424.81 1063.37,1395.14 1080.57,1377.95 C18.2 ; v1(1066.93,1637.8) 1066.93,1574.8 R11.1 R11.1@1126.06,1584.84 ; v1(1070.87,590.55) C9.2 ; v1(1862.2,1968.5) C27.2 ; U3.6 2316.07,3242.72 2334.26,3224.53 2334.26,3216.92 v1(2334.65,3216.54) v1@2333.98,3207.31 ; U3.5@2262.85,3190.7 2317.36,3190.69 2326.15,3199.48 ; DZ2.1 2216.54,2165.35 2216.54,1972.44 2267.72,1972.44 ; C22.2@2327.26,1972.38 C22.2 2267.72,1972.44 ; R18.1 v1(2462.28,2362.2) ; v1(2472.44,1889.76) 2289.23,1889.76 2267.72,1911.27 2267.72,1972.44 ; C21.2 v1(2755.91,4602.36) ; T2.2 2990.91,2904.76 2990.91,2879.17 2991.74,2878.34 2991.74,2854.71 v1(2992.13,2854.33) ; T3.3 v1(3346.46,3035.43) ; Q1.3 v1(3440.94,2125.98) ; v1(3838.58,2500) 3838.58,2559.06 R24.1 ; DZ3.1 3824.66,2362.2 3807.09,2344.63 3807.09,2182.93 3824.66,2165.35 C26.2 ; C4.2 v1(4374.02,2244.09) ; C5.2 v1(4440.94,1377.95) ; v1(4633.86,1400.14) U1.1 ; C6.2 4830.71,1968.5 v1(4830.71,2165.35) 4830.71,2228.35 4952.76,2228.35 4952.76,2149.61 C7.2 ; C23.2@5349.84,3145.67 C23.2@5351.23,3147.05
  Top Layer w60: v1(393.7,4102.36) C0.2 ; v1(2263.78,3669.18) 2263.78,3738.58 Q3.3 ; v1(3779.53,2952.76) D3.1 ; v1(4137.8,685.04) C3.2 ; v1(5118.11,4078.74) C25.2 ; v1(5185.04,704.72) C2.2
  Top Layer w160: v5(5429.13,3838.58) 5707.09,3838.58 J4.2
  other v1: 3807.09,2279.53 4909.45,3074.8
NetC8_1: C8.1 U2.33 Y1.2 | length 599.2
  Top Layer w10: 1424.8,701.18 U2.33
  Top Layer w20: C8.1 1226.1,889.76 1220.47,889.76 Y1.2 1292.77,787.4 1299.21,780.96 1299.21,675.73 1305.66,669.29 1418.36,669.29 1424.8,675.73 1424.8,701.18
NetC9_1: C9.1 U2.35 Y1.1 | length 785.9
  Top Layer w10: 1466.54,690.94 U2.35
  Top Layer w20: Y1.1 1081.25,787.4 1074.8,780.96 1074.8,675.73 1081.25,669.29 1219.66,669.29 1226.1,662.85 C9.1 1330.71,590.55 1330.71,622.05 1342.52,633.86 1466.54,633.86 1466.54,690.94
NetC15_1: C15.1 J2.2 R6.1 | length 479.8
  Top Layer w20: R6.1 2043.31,393.7 2043.31,389.76 J2.2 1979.92,390.55 1979.92,578.84 1991.63,590.55 C15.1
NetC19_1: C19.1 C20.1 L2.1 Q2.3 Q3.2 R15.1 R22.2 TVS1.1 U4.6 VS.1 | length 4434.1
  Top Layer w20: U4.6 1494.49,2506.3
  Top Layer w25: TVS1.1@1330.71,2637.8 TVS1.1
  Top Layer w30: VS.1@1181.1,2751.97 1181.1,2592.38 1198.68,2574.8 1476.91,2574.8 1494.49,2557.23 1494.49,2506.3
  Top Layer w60: 1275.59,2740.16 1275.59,2665.35 1303.15,2637.8
  Top Layer w80: R15.1 881.89,3346.46 881.89,3515.75 ; C19.1 1307.09,3149.61 ; R22.2 1291.34,3346.46 1305.12,3360.24 1305.12,3464.95 1258.26,3511.81 885.83,3511.81 881.89,3515.75 ; 1275.59,2740.16 1263.78,2751.97 1181.1,2751.97 VS.1 1177.17,2759.84 1177.17,2828.2 1183.61,2834.65 1219.66,2834.65 1226.1,2841.09 C20.1 1260.22,2952.76 1307.09,2999.62 1307.09,3149.61 ; 1307.09,3352.9 1307.09,3149.61 ; L2.1 1555.12,3948.82 ; Q3.2 2165.35,3931.25 2147.78,3948.82 1555.12,3948.82 ; 881.89,3515.75 881.89,3734.65 Q2.3 887.4,3807.47 934.26,3854.33 1508.26,3854.33 1555.12,3901.19 1555.12,3948.82
NetC19_2: C19.2 C20.2 D2.2 U4.7 VB.1 | length 2492.4
  Top Layer w20: U4.7 1444.88,2441.34 1444.88,2492.13
  Top Layer w25: 1444.49,2534.06 1444.88,2533.67
  Top Layer w30: v1(893.7,2755.91) VB.1 787.4,2289.91 793.85,2283.46 D2.2 ; v1(1051.18,2759.84) 1055.12,2763.78 1055.12,2948.82 ; 1051.18,2948.82 1010.38,2948.82 1003.94,2942.38 1003.94,2551.24 1021.51,2533.67 1444.88,2533.67 1444.88,2492.13 ; 1055.12,2952.76 1055.12,2948.82 ; 1055.12,2956.69 1055.12,3143.16 1061.56,3149.61 C19.2 ; C20.2 1132.17,2948.82 1055.12,2948.82
  Bottom Layer w30: v1(893.7,2755.91) 1046.7,2755.91 1050.64,2759.84 v1(1051.18,2759.84)
NetC25_1: C25.1 L3.2 R23.2 U5.1 U5.2 | length 4443.6
  Top Layer w50: L3.2 L3.2@4159.14,4600.56 ; 4350.39,4600.56 4356.84,4594.11 ; 4356.84,3174.61 U5.2 ; 4356.84,3224.61 U5.1 ; R23.2@4774.1,2365.2 R23.2 4854.57,2362.2 4883.86,2391.49 4883.86,2435.04 ; 5088.82,4600.56 5118.11,4571.27 ; C25.1@5111.85,4469.84 C25.1
  Top Layer w80: L3.2@4159.14,4600.56 4350.39,4600.56 5088.82,4600.56 ; 4356.84,4594.11 4356.84,3224.61 4356.84,3174.61 4356.84,2666.7 4403.7,2619.84 4830.95,2619.84 4883.86,2566.93 4883.86,2435.04 ; C25.1 5118.11,4571.27
NetD1_B: D1.B R9.2 | length 419.6
  Top Layer w20: R9.2 2492.13,787.4 D1.B
NetD1_G: D1.G R8.2 | length 415.6
  Top Layer w20: R8.2 2210.35,976.38 2334.65,976.38 2334.65,858.27 2433.07,858.27 D1.G
NetD1_R: D1.R R7.2 | length 356.7
  Top Layer w20: R7.2 2426.63,1181.1 2433.07,1174.66 D1.R
NetD3_2: "Vout Q4.1" D3.2 L3.1 Q4.2 | length 1970.9
  Top Layer w95: Q4.2 3543.31,3544.45 3650.77,3436.99 4122.05,3436.99 ; D3.2 4078.21,2952.76 4133.86,3008.41 4133.86,3448.82 ; 4122.05,3448.82 4133.86,3448.82 ; 4133.86,3841.38 4133.86,3448.82 ; 4157.48,3865 L3.1
NetD4_1: D4.1 U5.3 U5.4 | length 708.8
  Top Layer w40: 4582.68,2755.91 D4.1
  Top Layer w60: 4582.68,2755.91 4480.12,2755.91 4456.69,2779.34 4456.69,3072.83 4458.46,3074.61 U5.4 4628.94,3106.42
NetHO_1: HO.1 R14.2 R22.1 R26.2 TVS1.2 | length 2068.2
  Top Layer w25: TVS1.2 1472.43,2637.8
  Top Layer w80: v6(673.23,2850.39) 673.23,2952.76 ; R26.2 673.23,2952.76 ; R22.1 1058.67,3346.46 1011.81,3299.59 1011.81,3239.78 921.64,3149.61 R14.2 832.4,3107.92 783.54,3059.06 706.29,3059.06 673.23,3025.99 673.23,2952.76 ; v3(1366.14,2850.39) 1480.31,2850.39 HO.1 1512.96,2694.06 1512.96,2651.12 1499.65,2637.8 1472.44,2637.8
  Bottom Layer w80: v6(673.23,2850.39) v3(1366.14,2850.39)
NetJ7_1: J7.1 Q1.2 R12.1 | length 4705.3
  Top Layer w20: J7.1 1477.95,121.95 1489.67,110.24 2893.89,110.24 2905.61,121.95 2905.61,1580.27 2893.89,1591.98 2686.47,1591.98 2686.47,1771.65 ; R12.1 2686.47,1771.65 ; Q1.2 2698.19,2226.38 2686.47,2214.66 2686.47,1771.65
NetJ7_2: J7.2 LIN.1 R29.2 U4.14 | length 5412.1
  Top Layer w20: 1644.49,1996.85 U4.14
  Top Layer w30: J7.2 1374.02,192.91 1374.02,84.5 1391.59,66.93 3139.91,66.93 3157.48,84.5 LIN.1@3157.48,185.04 ; 1644.49,1996.85 1644.49,1916.59 1691.81,1869.27 2233.39,1869.27 2251.97,1850.69 2251.97,1771.65 ; v1(2251.97,1708.66) 2251.97,1771.65 ; R29.2 2251.97,1771.65 ; LIN.1 v1(3149.61,1712.6)
  Bottom Layer w30: v1(2251.97,1708.66) 3145.13,1708.66 3149.07,1712.6 v1(3149.61,1712.6)
NetLO_1: LO.1 R17.2 R27.2 R28.2 TVS2.1 | length 1269.4
  Top Layer w30: R28.2 1696.85,3149.61 ; R17.2 1690.41,3346.46 1696.85,3340.01 1696.85,3149.61 ; TVS2.1 1722.3,2637.8 1704.72,2655.37 1704.72,2755.91 ; LO.1 1704.72,2755.91 ; 1696.85,3149.61 1696.85,3031.4 1685.13,3019.69 1631.52,3019.69 1619.8,3007.97 R27.2 1627.68,2944.88 1687.15,2944.88 1704.72,2927.31 1704.72,2755.91
NetQ1_1: Q1.1 R13.1 | length 463.9
  Top Layer w20: R13.1 3259.94,1976.38 3271.65,1988.09 3271.65,2023.62 3271.65,2125.98 Q1.1
NetQ2_1: Q2.1 R14.1 R15.2 | length 790.3
  Top Layer w40: 653.54,3318.83 653.54,3156.05 659.99,3149.61 R14.1 ; 653.54,3322.83 653.54,3622.05 687.01,3655.51 687.01,3728.74 681.5,3734.25 Q2.1 Q2.1@687.4,3725.94 ; 657.54,3344.01 659.99,3346.46 R15.2
NetQ3_1: Q3.1 R17.1 R19.2 | length 1162.6
  Top Layer w40: R17.1 1482.82,3346.46 1476.38,3352.9 1476.38,3543.31 ; R19.2 1476.38,3543.31 ; Q3.1 1435.58,3740.16 1429.13,3733.71 1429.13,3566.93 1452.76,3543.31 1476.38,3543.31
NetQ4_1: Q4.1 R20.1 | length 729.5
  Top Layer w60: R20.1 3255.91,3346.46 3443.31,3533.86 Q4.1
NetR1_1: R1.1 U2.11 | length 245.8
  Top Layer w10: U2.11 1525.59,1320.91 1519.73,1326.77 1486.76,1326.77 1480.31,1333.22 1480.31,1367.57 1486.76,1374.02 1525.87,1374.02 R1.1
NetR2_1: R2.1 U2.12 | length 551.2
  Top Layer w10: v1(1478.35,1291.34) 1479.72,1291.34 1505.91,1265.16 U2.12
  Top Layer w20: v1(1409.45,1291.34) 1409.45,1555.21 1429.04,1574.8 R2.1
  Bottom Layer w30: v1(1409.45,1291.34) v1(1478.35,1291.34)
NetR3_1: R3.1 U2.14 | length 1209.5
  Top Layer w10: v1(1356.3,1222.44) 1356.3,1190.94 1379.64,1167.6 1457.95,1167.6 1466.52,1176.17 U2.14
  Top Layer w20: v1(1005.91,1228.35) 988.19,1246.06 988.19,1696.39 1075.26,1783.46 1124.29,1783.46 R3.1
  Bottom Layer w11: v1(1005.91,1228.35) 1009.84,1224.41 1354.33,1224.41 v1(1356.3,1222.44)
NetR4_1: R4.1 U2.15 | length 751.6
  Top Layer w10: U2.15 1446.85,1430.56 1453.29,1437.01 1847.89,1437.01 1854.33,1430.56 1854.33,1377.95 R4.1
NetR5_1: R5.1 U2.16 | length 304.4
  Top Layer w10: R5.1 1272.34,1181.1 1299.21,1207.97 1299.21,1255.39 1305.66,1261.84 1418.36,1261.84 1424.8,1255.39 U2.16
NetR20_2: R20.2 T1.3 T2.3 | length 906.3
  Top Layer w30: T1.3 2559.06,3098.43 2840.01,3098.43 ; R20.2 2840.01,3346.46 2840.01,3098.43 ; T2.3 2952.76,3098.43 2840.01,3098.43
NetR21_2: R21.2 T1.1 T2.1 T3.2 | length 2330.5
  Top Layer w30: T1.1 2521.65,2502.51 2767.72,2502.51 ; R21.2@2901.57,2565.24 R21.2@2903.82,2562.99 ; R21.2 2781.35,2559.06 2763.78,2541.48 2763.78,2506.44 2767.72,2502.51 ; T2.1 2917.32,2905.51 2917.32,2745.92 2934.9,2728.35 3142.41,2728.35 3159.99,2710.77 3159.99,2645.67 ; T3.2 3385.83,2905.51 3385.83,2663.24 3368.25,2645.67 3159.99,2645.67 ; 2767.72,2502.51 3142.41,2502.51 3159.99,2520.08 3159.99,2555.12 3159.99,2566.25 3159.99,2645.67
NetR25_2: R25.2 T3.1 | length 2084
  Top Layer w20: R25.2 3129.92,2362.2 3129.92,2464.57 3496.06,2464.57 3496.06,3169.29 3232.28,3169.29 3232.28,2814.96 3297.34,2814.96 3309.06,2826.68 T3.1
NetR26_1: R26.1 U4.8 | length 1057.1
  Top Layer w20: 1366.14,2492.13 1393.7,2492.13 1393.7,2441.73 U4.8
  Top Layer w25: 970.72,2495.67 974.27,2492.13
  Top Layer w30: R26.1 946.31,2952.76 952.76,2946.31 952.76,2513.64 970.72,2495.67 ; 974.27,2492.13 1366.14,2492.13
NetR27_1: R27.1 U4.1 | length 681.6
  Top Layer w20: U4.1 1744.49,2549.36
  Top Layer w30: R27.1 1529.8,2890 1553.66,2866.14 1643.84,2866.14 1661.42,2848.57 1661.42,2584.5 1678.99,2566.93 1726.91,2566.93 1744.49,2549.36
NetR31_2: R31.2 U4.13 | length 481.5
  Top Layer w10: R31.2 1295.28,2102.36 v1(1295.28,2106.3)
  Top Layer w20: U4.13 v1(1594.49,2149.61)
  Bottom Layer w11: v1(1295.28,2106.3) 1559.06,2106.3 1571.56,2118.8 1571.56,2126.58 1594.49,2149.51 v1(1594.49,2149.61)
PWM_1: "uC - PWM L.1" HIN.1 R13.2 R30.2 U2.39 U4.12 | length 6544.4
  Top Layer w10: 1545.28,702.76 U2.39
  Top Layer w20: 787.4,196.85 893.7,196.85 1023.62,326.77 1535.53,326.77 1547.24,338.49 1547.24,586.61 1396.21,586.61 1389.76,580.17 1389.76,507.87 1385.83,503.94 v2(1023.62,503.94) ; 1544.49,1981.5 U4.12 ; 1545.28,586.61 1545.28,702.76 ; v2(2744.09,1830.71) 2744.09,1964.66 2755.81,1976.38 R13.2
  Top Layer w30: HIN.1 929.13,1574.8 ; v2(929.13,507.87) 929.13,1574.8 ; 1544.49,1981.5 1544.49,1906.89 ; R30.2 2122.14,1771.65 2133.86,1783.37 v2(2133.86,1830.27) 1576.05,1830.27 1561.26,1845.06 1561.26,1890.12 1549.8,1901.57 1544.49,1906.89 ; 929.13,1574.8 929.13,1889.32 946.71,1906.89 1544.49,1906.89
  Bottom Layer w11: v2(929.13,507.87) v2@931.1,505.91 ; v2@1021.65,505.91 v2(1023.62,503.94)
  Bottom Layer w20: v2@931.1,505.91 v2@1021.65,505.91 ; v2(2133.86,1830.27) 2134.08,1830.49 2743.87,1830.49 v2(2744.09,1830.71)
PWM_2: "uC - PWM H.1" J7.3 U2.41 | length 1353.7
  Top Layer w10: 1584.65,299.21 1586.61,299.21 ; 1584.65,687.01 U2.41 1584.66,724.7 U2.41@1585.32,724.03
  Top Layer w20: J7.3 1277.95,281.05 1289.67,292.77 1641.83,292.77 1653.54,281.05 1653.54,203.29 1659.99,196.85 1968.5,196.85
  Top Layer w25: 1584.65,299.21 1584.65,687.01
PWM_3: "PWM BUCK 2.1" R25.1 U2.43 | length 3902
  Top Layer w10: U2.43 v1(1624.02,845.95)
  Top Layer w20: v1(2854.33,846.46) 2854.33,1299.31 2838.68,1314.96 2602.27,1314.96 2590.55,1326.68 2590.55,2350.49 2602.27,2362.2 R25.1@2905.51,2362.2 ; R25.1 R25.1@2905.51,2362.2 ; 3346.46,2362.2 3169.52,2362.2 3123.52,2316.2 2905.51,2316.2 R25.1@2905.51,2362.2
  Bottom Layer w11: v1(1624.02,845.95) v1@1625,846.93
  Bottom Layer w20: v1@1625,846.93 1625.73,846.2 2854.08,846.2 v1(2854.33,846.46)
RGB_B: R9.1 U2.58 | length 534.1
  Top Layer w10: U2.58 1844.5,1013.77 1848.99,1009.28 1860.97,1009.28
  Top Layer w20: 1860.97,1009.28 1937.1,1009.28 1948.82,997.56 1948.82,936.91 1960.53,925.2 2039.37,925.2 2039.37,783.46 2120.35,783.46 R9.1
RGB_G: R8.1 U2.59 | length 352.5
  Top Layer w10: U2.59 1864.3,1033.46 1868.11,1037.28
  Top Layer w20: 1868.11,1037.28 2031.62,1037.28 2051.18,1017.72 2051.18,995.97 2062.9,984.25 R8.1
RGB_R: R7.1 U2.60 | length 424.6
  Top Layer w10: U2.60 1843.45,1053.16 1857.74,1067.45
  Top Layer w20: 1857.74,1067.45 1871.99,1081.7 2038.39,1081.7 2038.39,1176.19 2115.44,1176.19 R7.1
RST_TGTMCU: J1.10 J2.1 U2.64 | length 2985.9
  Top Layer w10: U2.64@1804.53,1133.86 U2.64 1857.87,1134.25 1858.27,1133.86
  Top Layer w20: 1858.27,1133.86 1910.88,1133.86 1910.88,1215.11 1935.93,1240.16 2775.59,1240.16 2783.46,1232.28 v2(2783.46,972.44) ; J2.1 1879.13,661.61 1890.85,673.33 v1@2417.23,673.33 ; v1(2653.54,976.38) 2654.53,975.39 2654.53,676.18 2657.28,673.43 2657.28,513.58 J1.10@2658.27,512.6
  Bottom Layer w20: v1(2417.32,673.23) 2418.31,674.21 2654.53,674.21 v1(2655.51,675.2) ; v1(2653.54,976.38) 2779.53,976.38 v2(2783.46,972.44)
SWD_CLK: J1.4 U2.52 | length 1098
  Top Layer w10: U2.52 1870.09,895.66
  Top Layer w20: 1870.09,895.66 1978.36,895.66 1998,876.01 1998,753.12 2009.72,741.4 2247.81,741.4 2252.31,745.9 2497.34,745.9 2509.06,734.19 J1.4
SWD_IO: J1.2 U2.53 | length 1186.6
  Top Layer w10: 1779.53,786.51 1732.28,833.76 1732.28,915.35 U2.53
  Top Layer w20: 1779.53,786.51 1779.53,724.31 1791.24,712.6 2059.06,712.6 2443.4,712.6 2459.06,696.95 J1.2
Vbat: C1.1 C2.1 D4.2 J4.1 J5.1 L1.1 Vbat.1 | length 5575.1
  Top Layer w40: D4.2 4870.08,2755.91
  Top Layer w50: 4669.88,3566.93 J5.1@4669.88,3735.63 ; C1.1 4958.94,952.76 ; 5507.87,2755.91 5511.81,2759.84
  Top Layer w60: 4870.08,2755.91 5507.87,2755.91
  Top Layer w160: 4669.88,3566.93 4669.88,3524.21 4669.29,3523.62 5469.93,3523.62 ; L1.1@4877.95,952.76 4958.94,952.76 4960.63,952.76 4960.63,948.82 4964.57,948.82 4964.57,1232.28 5515.75,1232.28 5515.75,2755.91 5511.81,2759.84 Vbat.1 5511.81,3605.01 5546.96,3640.16 J4.1 J4.1@5708.66,3637.8
VCC: C0.1 J3.1 R10.2 U3.1 U3.2 VCC.1 | length 8178.2
  Top Layer w60: v3(988.19,1850.39) 1374.02,1850.39 1452.76,1771.65 R10.2
  Top Layer w80: J3.1 129.92,4387.26 214.4,4471.74 387.44,4471.74 393.7,4465.48 C0.1 2327.15,4463.58 2374.02,4416.72 2374.02,3612.54 2312.66,3551.18 1893.7,3551.18 1834.65,3492.13 1834.65,3354.33 1842.52,3346.46 1842.52,3318.9 2069.88,3318.9 ; J3.1@133.86,3840.16 240.92,3840.16 334.65,3746.43 334.65,3467.74 255.91,3389 255.91,2385.83 196.85,2326.77 VCC.1 543.31,1968.5 543.31,1897.26 590.17,1850.39 v3(724.41,1850.39)
  Bottom Layer w60: v3(724.41,1850.39) v3(988.19,1850.39)
Vo: C21.1 J6.1 L2.2 Q4.3 R16.2 R21.1 T1.2 Vo.1 | length 6143
  Top Layer w40: R16.2 2409.45,2566.93 2409.45,2657.48 2441.14,2657.48 2464.57,2680.91 2464.57,2929.32 2441.14,2952.76 2409.45,2952.76 v1(2409.45,3039.37) 2409.45,3228.35 2700.79,3228.35 Vo.1 2703.35,3475 2703.35,3737.6 J6.1 2705.91,3849.21 ; T1.2 2700.98,2905.51 2724.41,2882.08 ; v1(2720.47,3039.37) 2724.41,3039.37 2724.41,2882.08 ; R21.1 2997.76,2638.62 2974.32,2662.05 2747.84,2662.05 2724.41,2685.49 2724.41,2882.08
  Top Layer w50: 2704.72,3986.22 2705.91,3985.04
  Top Layer w80: L2.2 2499.96,4634.33 2517.53,4616.76 2517.53,4165.35 ; 2704.72,3986.22 2694.88,3996.06 2564.4,3996.06 2517.53,4042.93 2517.53,4165.35 ; 2705.91,3849.21 2705.91,3985.04 ; Q4.3@3643.31,3749.37 3643.31,3943.31 3437.72,4148.9 2772.36,4148.9 C21.1 2517.53,4165.35
  Bottom Layer w40: v1(2409.45,3039.37) v1(2720.47,3039.37)
Vs: Q2.2 U3.3 U3.4 | length 1831.4
  Top Layer w10: U3.4 2069.88,3217.71 U3.3
  Top Layer w80: v3(1933.07,3224.41) 2004.08,3224.41 2008.45,3220.04 2067.56,3220.04 2069.88,3217.71
  Bottom Layer w60: Q2.2@779.53,3740.16 Q2.2 787.4,3610.24
  Bottom Layer w80: 787.4,3610.24 787.4,3271.27 834.26,3224.41 v3(1933.07,3224.41)
pads on no net: ASM2.0 ASM3.0 ASM4.0 ASM5.0 J1.6 J1.7 J1.8 J1.9 U2.1 U2.2 U2.3 U2.4 U2.5 U2.6 U2.7 U2.10 U2.13 U2.17 U2.18 U2.19 U2.26 U2.27 U2.28 U2.29 U2.30 U2.31 U2.32 U2.36 U2.37 U2.38 U2.40 U2.42 U2.44 U2.45 U2.46 U2.47 U2.48 U2.49 U2.50 U2.51 U2.54 U2.57 U2.61 U2.62 U2.63 U4.4 U4.5 U4.9 U4.10 U4.16
copper on no net:
  other v4: 1795.28,1271.65

## Polygon pours and split planes (outlines as drawn)
GND on Bottom Layer "GND_L02_P000" (solid, pour order 0): 0,4921.26 5553.3,4921.26 5553.3,41.56 0,41.56

## Keep-outs
Keep-Out Layer:
  circle w10: c5661.42,4862.2 r84.67
  circle w10: c5661.42,137.8 r84.67
  circle w10: c149.61,137.8 r84.67
  circle w10: c5661.42,4862.2 r84.67
  circle w10: c149.61,4862.2 r84.67
  lines w12: 0,0 5822.83,0 5822.83,4988.19 0,4988.19 0,0

## Silkscreen, mask and mechanical layers (free items; w line width, h text height)
Top Overlay:
  text "UTN.FRBA - MPTT - SOBRAL" at 419.76,4821.34 h118.11
  text "CASING 1555SGY" at 3754.41,4813.46 h118.11
Mechanical 1:
  lines w10: -15.75,-15.75 5842.52,-15.75
  lines w11: -15.75,-15.75 -15.75,5007.87 5842.52,5007.87
  lines w12: 5842.52,-15.75 5842.52,5007.87